# Altium PCB PCB1.PcbDoc
Units mil, origin at the board's own origin, x right, y up, seen from the top; angles counter-clockwise.
Board outline 1615 x 1930 mil, 2 copper layers (Top Layer, Bottom Layer); 24 components, 43 nets, 142 pads, 52 vias.
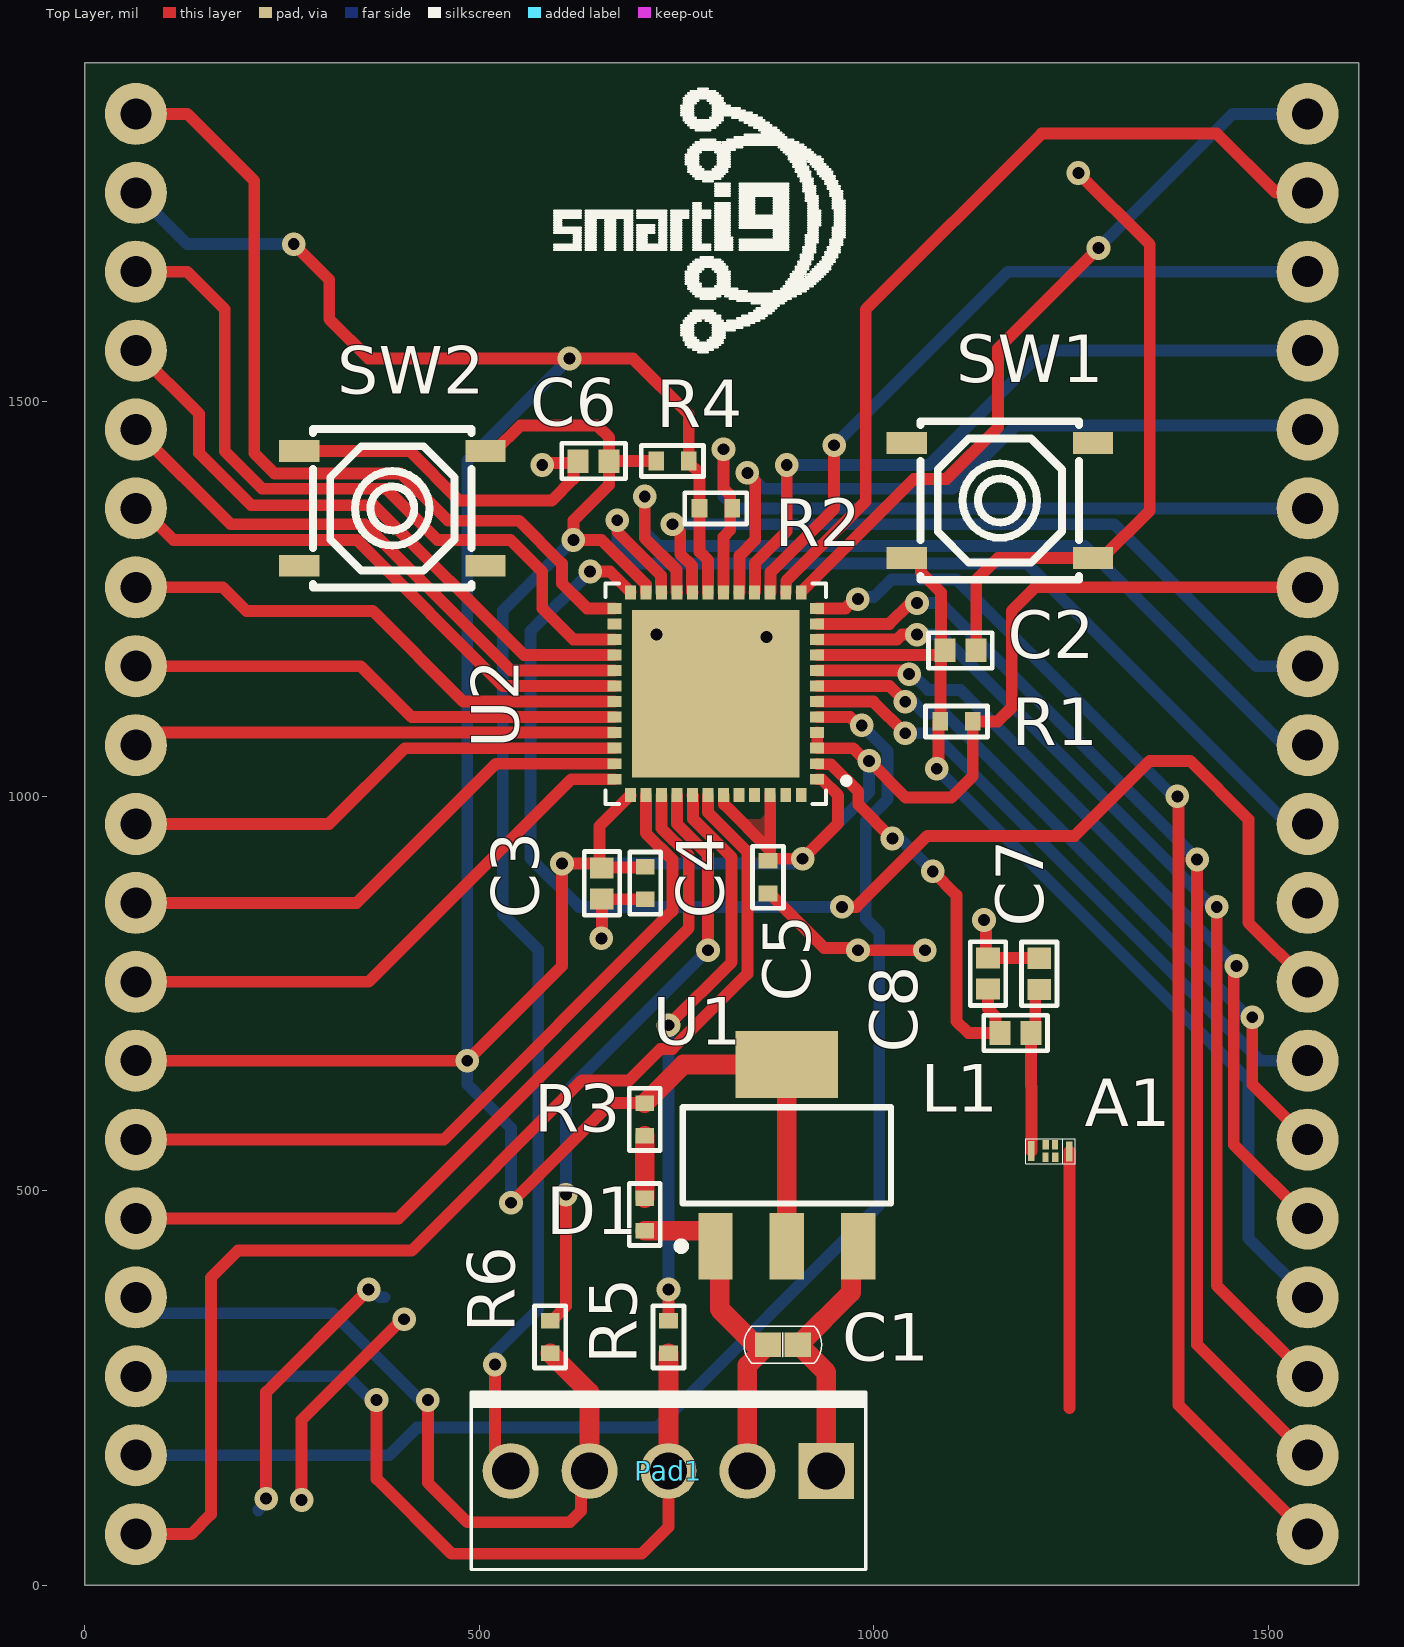
[diagram p0: Top Layer view]
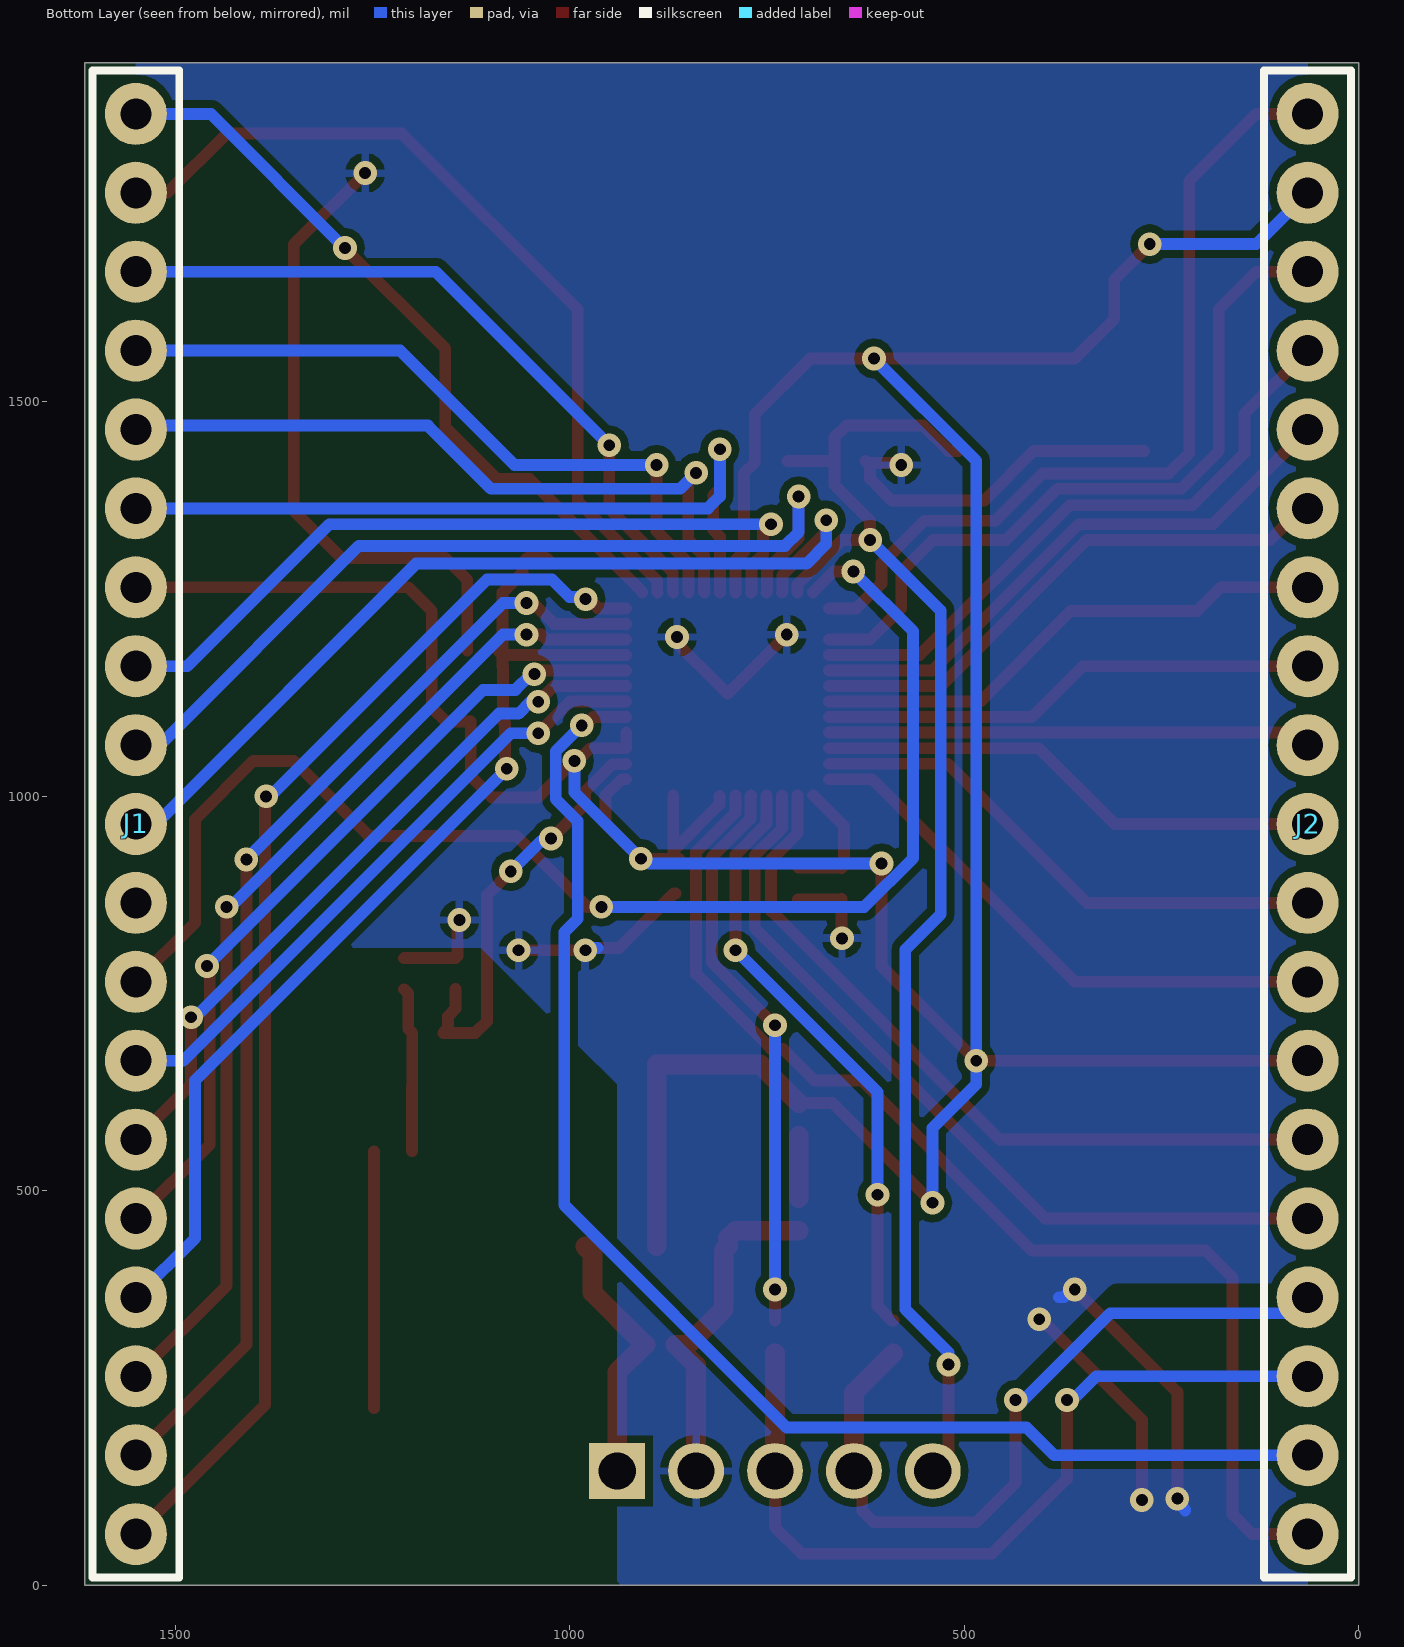
[diagram p1: Bottom Layer view, seen from below]
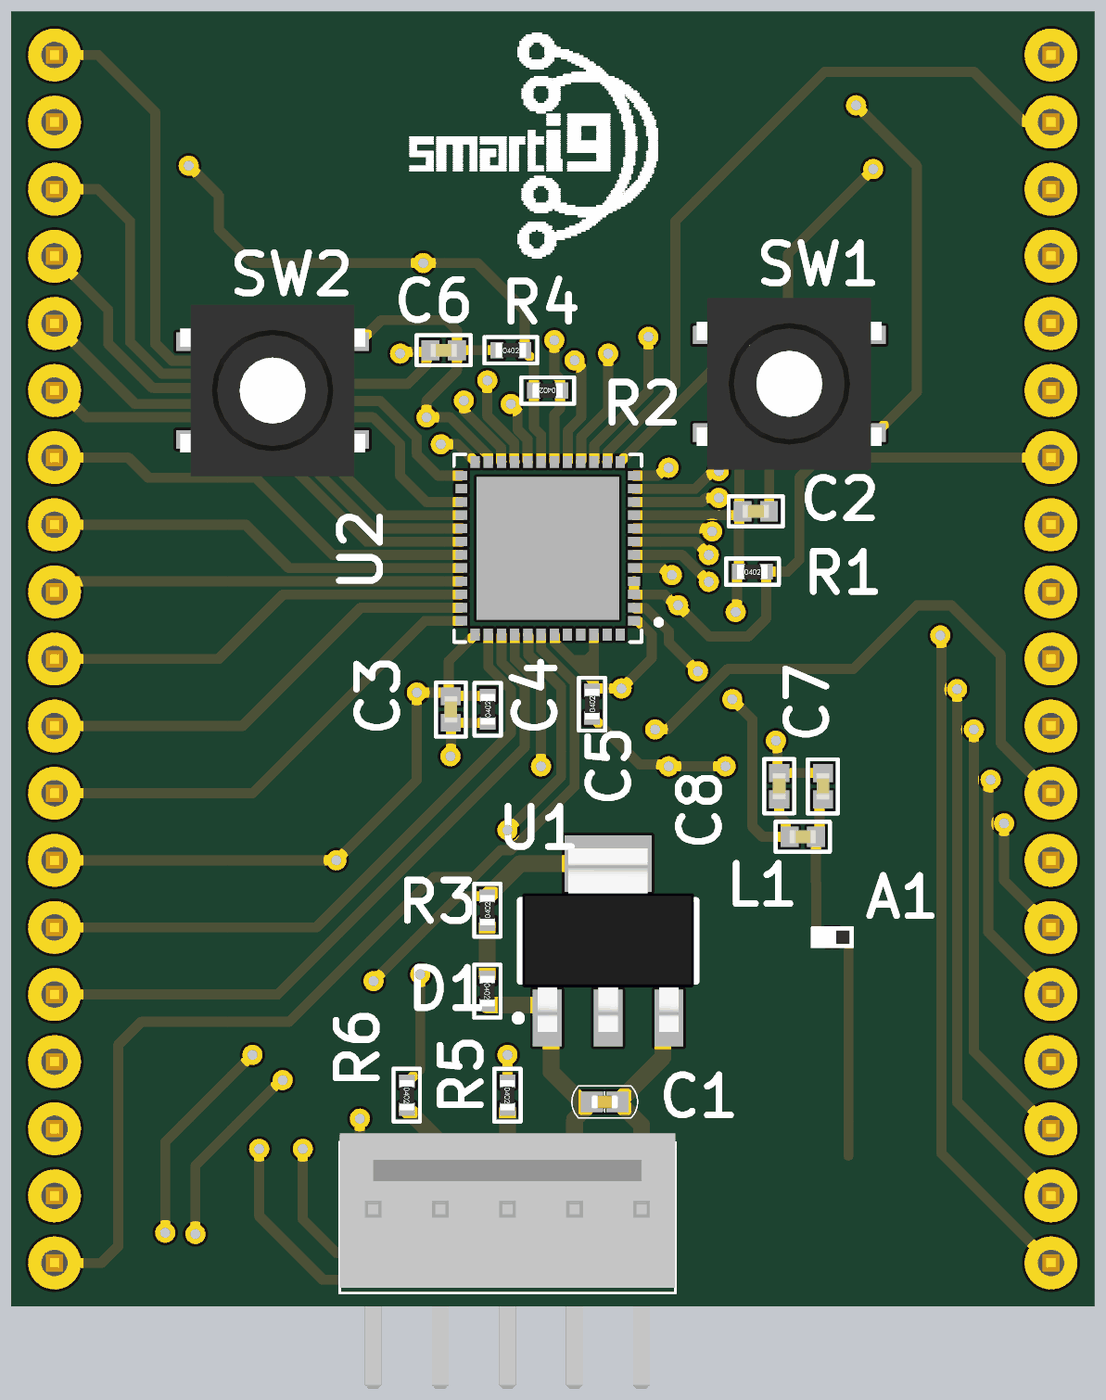
[diagram p2: 3D render of the assembled board from above, using the file's embedded part models]

## Layer stack, top to bottom
Top Solder: solder mask 0.4, Solder Resist, Dk 3.5
Top Layer: signal copper 1.4
Dielectric 1: dielectric 12.6, FR-4, Dk 4.8
Bottom Layer: signal copper 1.4
Bottom Solder: solder mask 0.4, Solder Resist, Dk 3.5

## Board outline
0,0 0,1930 1615,1930 1615,0

## Design rules (kind name [scope] priority, off if disabled: settings)
Clearance [All] p1: gap=1 ignorepadtopadclearanceinfootprint=FALSE except(10: Arc-Fill Arc-Poly Arc-Region Track-Fill Track-Poly Track-Region SMDPad-Fill SMDPad-Poly SMDPad-Region THPad-Fill THPad-Poly THPad-Region Via-Fill Via-Poly Via-Region Fill-Fill Fill-Poly Fill-Region Poly-Poly Poly-Region Region-Region)
PolygonConnect [All] p1: connectstyle=Relief reliefconductorwidth=10 reliefentries=4 polygonreliefangle="90 Angle" airgapwidth=10
RoutingVias [All] p1: holewidth=15 width=30 viastyle="Through Hole" minholewidth=10 minwidth=25 maxholewidth=20 maxwidth=35
SolderMaskExpansion [All] p1: expansion=4
Width [All] p1: maxlimit=50 minlimit=10 preferedwidth=15 minimp=50.000000 maximp=50.000000 favimp=50.000000
30 further rules are at their usual default settings.

## Components (designator, comment, footprint, x,y, rotation, side; value= is the part's Value field where it differs from the comment)
A1 "Antenna 2.4GHz" PCBComponent_1#1 1224.15,550.47 r180 top
C1 "CAP 10uF/50V" "CAP 100nF/50V" 885,305 r0 top
C2 "CAP 100nF/50V" "CAP 10uF/6.3V" 1110,1185 r180 top
C3 "CAP 10uF/50V" "CAP 22uF/6.3V" 655.65,889.68 r90 top
C4 "CAP 10uF/50V" "RES SMD 62k OHM 1% 1/16W 0402" 710.65,890 r90 top
C5 "CAP 100nF/16V" "RES SMD 200k OHM 1% 1/16W 0402" 866.1,897.58 r90 top
C6 "CAP 100nF/50V" "CAP 22uF/6.3V" 645,1425 r0 top
C7 "CAP 100nF/50V" "CAP 10uF/6.3V" 1210,775.16 r270 top
C8 "CAP 100nF/50V" "CAP 10uF/6.3V" 1145,775.47 r270 top
D1 "LED Blue" "RES SMD 0 OHM 1/16W 0402" 710,470 r270 top
J1 "Pin Header" "Pin Header 19 Ways" 1550,1865 r270 bottom
J2 "Pin Header" "Pin Header 19 Ways" 65,65 r90 bottom
L1 "LBEAD" "CAP 10uF/6.3V" 1180,700.16 r180 top
Pad1 "CN_KK_5" CN_KK_5_5045-5 740,145 r180 top value=?
R1 "RES 0603" "RES SMD 0 OHM 1/16W 0402" 1105,1095 r0 top
R2 "RES 0603" "RES SMD 0 OHM 1/16W 0402" 800,1365 r180 top
R3 "RES 0603" "RES SMD 430 OHM 1% 1/16W 0402" 710,590.67 r90 top
R4 "RES 0603" "RES SMD 0 OHM 1/16W 0402" 745,1425 r0 top
R5 "RES 0603" "RES SMD 0 OHM 1/16W 0402" 740,315 r270 top
R6 "RES 0603" "RES SMD 0 OHM 1/16W 0402" 590,315 r270 top
SW1 "Tactile Switch SPST 5.10X0.40 mm" PCBComponent_1#2 1160,1375 r180 top
SW2 "Tactile Switch SPST 5.10X0.40 mm" PCBComponent_1#2 390,1365 r0 top
U1 "LM1117" LM1117 890,545 r90 top
U2 "ESP32-PICO-D4" *PQFN50P700X700X104-49N 800,1130 r180 top

## Footprints (in the part's own frame and the unit in brackets; to place one, negate y for a bottom-side part, rotate by r counter-clockwise, add the part's x,y. Pads: shape width x height; smd on the part's side, far side on the other; paste and mask are expansions set on the pad)
*PQFN50P700X700X104-49N [mm]
  rect 0.45x0.35 smd: 1(-3.265,2.75) 2(-3.265,2.25) 3(-3.265,1.75) 4(-3.265,1.25) 5(-3.265,0.75) 6(-3.265,0.25) 7(-3.265,-0.25) 8(-3.265,-0.75) 9(-3.265,-1.25) 10(-3.265,-1.75) 11(-3.265,-2.25) 12(-3.265,-2.75) 25(3.265,-2.75) 26(3.265,-2.25) 27(3.265,-1.75) 28(3.265,-1.25) 29(3.265,-0.75) 30(3.265,-0.25) 31(3.265,0.25) 32(3.265,0.75) 33(3.265,1.25) 34(3.265,1.75) 35(3.265,2.25) 36(3.265,2.75)
  rect 0.35x0.45 smd: 13(-2.75,-3.265) 14(-2.25,-3.265) 15(-1.75,-3.265) 16(-1.25,-3.265) 17(-0.75,-3.265) 18(-0.25,-3.265) 19(0.25,-3.265) 20(0.75,-3.265) 21(1.25,-3.265) 22(1.75,-3.265) 23(2.25,-3.265) 24(2.75,-3.265) 37(2.75,3.265) 38(2.25,3.265) 39(1.75,3.265) 40(1.25,3.265) 41(0.75,3.265) 42(0.25,3.265) 43(-0.25,3.265) 44(-0.75,3.265) 45(-1.25,3.265) 46(-1.75,3.265) 47(-2.25,3.265) 48(-2.75,3.265)
  rect 5.4x5.4 smd: 49(0,0)
  silkscreen extent -4.3,-3.55 3.55,3.55
"CAP 10uF/6.3V" [mm] "10µF ±20% 6.3V Ceramic Capacitor X5R 0402 (1005 Metric)"
  rect 0.68x0.76 smd: 1(-0.5,0) 2(0.5,0)
  silkscreen extent -1.03,-0.57 1.03,0.57, body extent -0.5,-0.25 0.5,0.25, height 0.51
"CAP 22uF/6.3V" [mm] "22µF ±20% 6.3V Ceramic Capacitor X5R 0402 (1005 Metric)"
  rect 0.68x0.76 smd: 1(-0.5,0) 2(0.5,0)
  silkscreen extent -1.03,-0.57 1.03,0.57, body extent -0.5,-0.25 0.5,0.25, height 0.51
"CAP 100nF/50V" [mm] "0.1µF ±10% 50V Ceramic Capacitor X5R 0402 (1005 Metric)"
  rect 0.84x0.78 smd: 1(-0.48,0) 2(0.48,0)
  silkscreen extent -1.25,-0.6 1.25,0.6, body extent -0.5,-0.25 0.5,0.25, height 0.51
CN_KK_5_5045-5 [mm]
  rect 1.8x1.8 hole 1.2: 1(-5.08,0)
  round 1.8 hole 1.2: 2(-2.54,0) 3(0,0) 4(2.54,0) 5(5.08,0)
  silkscreen extent -6.35,-2.54 6.35,3.18, body extent -6.35,-2.87 6.35,6.77, height 11.11
LM1117 [mm] "SOT223, 4-Leads, Body 6,50x7,00mm (avg), Pitch 2,30mm, IPC Medium Density"
  rect 2.15x1.1 smd: 1(-2.925,2.3) 2(-2.925,0) 3(-2.925,-2.3)
  rect 2.15x3.3 smd: 4(2.925,0)
  silkscreen extent -3.05,-3.35 1.55,3.52, body extent -3.45,-3.25 3.51,3.25, height 1.66
PCBComponent_1#1 [mil]
  rect 8.26x25.2 smd: 1(-24.07,0.42) 4(24.07,0.03)
  rect 7.88x11.81 smd: 2(-5.94,8) 3(6.2,8.03) 5(6.06,-8.03)
  rect 7.87x11.81 smd: 6(-5.85,-8.03)
  silkscreen extent -31,-16 32,16, body extent -31,-16 31,16, height 16
PCBComponent_1#2 [mil]
  rect 51.18x27.56 smd: 1(-118.11,72.83) 2(118.11,72.83) 3(-118.11,-72.84) 4(118.11,-72.84)
  silkscreen extent -100,-100 100,100, body extent -138,-128 138,128, height 122
"Pin Header 19 Ways" [mm] "Connector Header 19 ways PTH 0.100\" (2.54mm)"
  round 2 hole 1: 1(0,0) 2(2.54,0) 3(5.08,0) 4(7.62,0) 5(10.16,0) 6(12.7,0) 7(15.24,0) 8(17.78,0) 9(20.32,0) 10(22.86,0) 11(25.4,0) 12(27.94,0) 13(30.48,0) 14(33.02,0) 15(35.56,0) 16(38.1,0) 17(40.64,0) 18(43.18,0) 19(45.72,0)
  silkscreen extent -1.4,-1.4 47.12,1.4, body extent -1.27,-1.27 46.99,1.27, height 10.11
"RES SMD 0 OHM 1/16W 0402" [mm] "0 Ohms Jumper 0.063W, 1/16W Chip Resistor 0402 (1005 Metric) Moisture Resistant Thick Film"
  rect 0.5x0.6 smd: 1(-0.525,0) 2(0.525,0)
  silkscreen extent -1,-0.5 1,0.5, body extent -0.57,-0.27 0.58,0.28, height 0.41
"RES SMD 62k OHM 1% 1/16W 0402" [mm] "62 kOhms ±1% 0.063W, 1/16W Chip Resistor 0402 (1005 Metric) Moisture Resistant Thick Film"
  rect 0.5x0.6 smd: 1(-0.525,0) 2(0.525,0)
  silkscreen extent -1,-0.5 1,0.5, body extent -0.57,-0.27 0.58,0.28, height 0.41
"RES SMD 200k OHM 1% 1/16W 0402" [mm] "200 kOhms ±1% 0.063W, 1/16W Chip Resistor 0402 (1005 Metric) Moisture Resistant Thick Film"
  rect 0.5x0.6 smd: 1(-0.525,0) 2(0.525,0)
  silkscreen extent -1,-0.5 1,0.5, body extent -0.57,-0.27 0.58,0.28, height 0.41
"RES SMD 430 OHM 1% 1/16W 0402" [mm] "430 Ohms ±1% 0.063W, 1/16W Chip Resistor 0402 (1005 Metric) Moisture Resistant Thick Film"
  rect 0.5x0.6 smd: 1(-0.525,0) 2(0.525,0)
  silkscreen extent -1,-0.5 1,0.5, body extent -0.57,-0.27 0.58,0.28, height 0.41

## Part data
A1: "SMD Antennas RoHS", Frequency Range="2.4 GHz", LCSC Part #=C209892, Manufacturer=TDK, MFR.Part #=ANT016008LCS2442MA2, ComponentLink1Description=Datasheet, ComponentLink1URL=https://datasheet.lcsc.com/szlcsc/1809131538_TDK-ANT016008LCS2442MA2_C209892.pdf
C1 C3 C4: library part "CAP  10uF/50V", "10uF ±1% 50V Ceramic Capacitor C0G, NP0 0805 (2012 Metric)", Capacitance=10uF, Manufacturer 1="Murata Electronics North America", Manufacturer 1 PN=GRM2165C1H102FA01D, Voltage=50V, ComponentLink1Description=Datasheet, ComponentLink1URL=https://www.murata.com/~/media/webrenewal/support/library/catalog/products/capacitor/mlcc/c02e.ashx?la=en-us, Digikey PN=490-6441-1-ND, Mouser PN=81-GRM2165C1H102FA01
C2 C6 C7 C8: "0.1µF ±10% 50V Ceramic Capacitor X5R 0402 (1005 Metric)", Capacitance=100nF, Manufacturer 1=Yageo, Manufacturer 1 PN=CC0402KRX5R9BB104, Voltage=50V, ComponentLink1Description=Datasheet, ComponentLink1URL=https://search.murata.co.jp/Ceramy/image/img/A01X/G101/ENG/GRM022R60J103KE19-01.pdf, Digikey PN=311-3342-1-ND
C5: "0.1µF ±20% 16V Ceramic Capacitor Y5V (F) 0805 (2012 Metric)", Capacitance=100nF, Manufacturer 1="Samsung Electro-Mechanics", Manufacturer 1 PN=CL21A106KOQNNWE, Voltage=16V, ComponentLink1Description=Specifications, ComponentLink1URL=http://www.samsungsem.com/kr/support/product-search/mlcc/__icsFiles/afieldfile/2018/07/27/CL21A106KOQNNWE.pdf, Digikey PN=1276-2894-1-ND, Mouser PN=581-08055C104K4Z4A
D1: "Blue 470nm LED Indication - Discrete 3.3V 0805 (2012 Metric)", Manufacturer 1="Lite-On Inc.", Manufacturer 1 PN=LTST-C171TBKT
J1 J2: library part "Pin Header 19 ways", "Connector Header PTH 0.100\" (2.54mm)", Manufacturer 1="Irwin Inc.", Manufacturer 1 PN=M20-9992046
L1: library part IND_LBEAD_SMD_1806, "Inductor LBEAD"
Pad1: "KK_5"
R1 R2 R4: library part "RES 10k 1% 1/8W", "10 kOhms ±1% 0.125W, 1/8W Chip Resistor 0603 (1608 Metric) Anti-Sulfur, Moisture Resistant Thin Film", Manufacturer 1="Stackpole Electronics Inc.", Manufacturer 1 PN=RNCP0603FTD10K0, Power=1/8W, Resistence=10k, ComponentLink1Description=Datasheet, ComponentLink1URL=http://www.yageo.com/documents/recent/PYu-RC_Group_51_RoHS_L_9.pdf, Digikey PN=RNCP0603FTD10K0CT-ND, Mouser PN=755-ESR03EZPF1002
R3 R5 R6: library part "RES 10k 1% 1/8W", "10 kOhms ±1% 0.125W, 1/8W Chip Resistor 0603 (1608 Metric) Anti-Sulfur, Moisture Resistant Thin Film", Manufacturer 1="Stackpole Electronics Inc.", Manufacturer 1 PN=RNCP0603FTD10K0, Power=1/8W, Resistence=1k, ComponentLink1Description=Datasheet, ComponentLink1URL=http://www.yageo.com/documents/recent/PYu-RC_Group_51_RoHS_L_9.pdf, Digikey PN=RNCP0603FTD10K0CT-ND, Mouser PN=755-ESR03EZPF1002
SW1 SW2: "TACTILE SWITCHES SPST 5.10MM X 5.10MM 0.40MM 50MA @ 12VDC SMD ROHS", Current="50 mA", LCSC Part #=C318884, Manufacturer="XKB Enterprise", MFR.Part #=TS-1187A-B-A-B, Package=SMD-SW-4_5.1x5.1x1.5, Voltage="12 VDC"
U1: "Linear Voltage Regulator IC Positive Fixed 1 Output 3.3V 1A SOT-223", Manufacturer 1="Diodes Incorporated", Manufacturer 1 PN=AZ1117EH-3.3TRG1, Manufacturer 2=STMicroelectronics, Manufacturer 2 PN=LD1117S33TR, ComponentLink1Description=Datasheet, ComponentLink1URL=https://www.diodes.com/assets/Datasheets/AZ1117E.pdf, Digikey PN=AZ1117EH-3.3TRG1DICT-ND, Mouser PN=621-AZ1117EH-3.3TRG1, Notes="Every PMIC named 1117 is the same"
U2: "RF TRANSCEIVER ICS QFN-48_7X7X05P ROHS", LCSC Part #=C193707, Manufacturer="Espressif Systems", Package=QFN-48_EP_7.0x7.0x0.5P, ComponentLink1Description=Datasheet, ComponentLink1URL=https://datasheet.lcsc.com/szlcsc/Espressif-Systems-ESP32-PICO-D4_C193707.pdf, ComponentLink2Description=Datasheet_EN, ComponentLink2URL=https://www.espressif.com/sites/default/files/documentation/esp32-pico-d4_datasheet_en.pdf, MFR.Part #=ESP32-PICO-D4

## Via types
v1: diameter 30, hole 15, Top Layer to Bottom Layer, 52 vias

## Nets (pads, with @x,y where several pads share a name; then routed paths per layer and width w, separated by ;. In a path a pad name is that pad's centre, name@x,y a point inside that pad or via, vN(x,y) a via of type N, cw(c..) or ccw(c..) an arc to the next point about the centre after c; other vN are vias at no path point)
EN: C2.2 J1.16 R1.1 SW1.2 U2.9 | length 1338.7
  Top Layer w15: U2.9 C2.2@1085.32,1179.21 ; SW1.2@1023.8,1295.89 1030.08,1302.17 SW1.2 1053.7,1302.17 1059.98,1295.89 1059.98,1284.08 1085.32,1258.74 C2.2@1085.32,1184.59 ; v1(1080,1035) 1082.16,1037.16 1082.16,1092.84 1084.82,1095.49 1084.82,1164.51 1085.32,1165 C2.2@1085.32,1179.21 ; C2.2@1090.72,1184.59 C2.2@1085.32,1179.21
  Bottom Layer w15: v1(1080,1035) 1475,640 1475,440 J1.16
EXT_5V: C1.2 Pad1.1 U1.3 | length 331.7
  Top Layer w25: C1.2 C1.2@905.08,305 ; Pad1.1 940,270.08 C1.2@905.08,305 ; U1.3 971.4,420.69 971.4,371.32 C1.2@905.08,305
FLASH_CLK: J2.13 U2.31 | length 666.5
  Top Layer w15: J2.13 175,1265 205,1235 365,1235 479.84,1120.16 U2.31
FLASH_CS: J2.19 U2.25 | length 1082.8
  Top Layer w15: J2.19 130,1865 215,1780 215,1435 240.63,1409.37 400.63,1409.37 460.67,1349.33 550.67,1349.33 605,1295 605,1270 636.73,1238.27 U2.25
FLASH_SD0: J2.17 U2.27 | length 932.1
  Top Layer w15: J2.17 130,1665 177.5,1617.5 177.5,1437.5 225,1390 382.16,1390 447.16,1325 539.63,1325 580,1284.63 580,1238.27 619.37,1198.9 U2.27
FLASH_SD1: J2.11 U2.33 | length 613
  Top Layer w15: J2.11 82.25,1065 98.04,1080.79 U2.33
FLASH_SD2: J2.14 U2.30 | length 699.7
  Top Layer w15: J2.14 72.5,1365 112.5,1325 345,1325 530.16,1139.84 U2.30
FLASH_SD3: J2.12 U2.32 | length 633.2
  Top Layer w15: J2.12 350,1165 414.53,1100.47 U2.32
GND: C1.1 C2.1 C3.1 C4.1 C5.1 C6.1 C7.1 C8.1 D1.2 Pad1.2 SW1.1 SW2.1 U1.1 U2.49 | length 3034.1
  Top Layer w15: v1(230,110) 230,245 v1(360,375) ; SW2.1 412.16,1437.84 475,1375 592.06,1375 619.43,1402.37 619.43,1419.11 C6.1@622.82,1422.5 ; v1(275,108.12) 275,210 402.38,337.38 v1(405,337.38) ; v1(580,1420) 582.5,1422.5 C6.1@622.82,1422.5 ; C6.1 C6.1@622.82,1422.5 ; v1(655,820) 655.65,820.65 C3.1 655.99,869.67 710.32,869.67 C4.1 ; v1(725,1205) U2.49 871.98,1201.98 v1(864.13,1201.98) ; C5.1 868.07,876.91 937.11,807.87 980.29,807.87 983.16,805 v1(1065,805) ; C2.1@1130,1185 1130,1274.33 1157.84,1302.17 SW1.1 1289.92,1302.17 1350,1362.24 1350,1699.51 v1(1259.51,1790) ; v1(1140,843.27) 1142.5,840.77 1142.5,797.66 C8.1 1145.16,795 1209.84,795 C7.1
  Top Layer w25: D1.2 790.29,449.33 799.45,440.18 U1.1 804.98,424.31 804.98,350.02 850,305 C1.1@864.92,305 ; Pad1.2 840,278.9 862.07,300.96 862.07,302.15 C1.1@864.92,305 ; C1.1 C1.1@864.92,305
  Bottom Layer w15: 220,95 220,95.94 230,105.94 v1(230,110) ; v1@270,108.12 v1(275,108.12) ; v1(360,375) 364.06,375 373.81,365.25 380,365.25 ; 965,808.12 965.25,807.87 977.42,807.87 v1(980.29,805)
IO0: C6.2 Pad1.5 R4.1 SW2.2 U2.23 | length 1775.6
  Top Layer w15: SW2.2 519.92,1437.84 552.09,1470 649.69,1470 664.69,1455 C6.2 ; v1(520,280) 520,165 Pad1.5 ; v1(619.43,1325) 619.43,1349.59 664.69,1394.84 C6.2 ; v1@624.33,1325 655,1325 711.42,1268.58 U2.23 ; R4.1 C6.2
  Bottom Layer w15: v1(520,280) 520,295 575,350 575,805.79 530,850.79 530,1235.57 614.53,1320.1 618.76,1320.1 619.43,1319.43 v1(619.43,1325)
IO2: J1.10 U2.22 | length 1166.7
  Top Layer w15: v1(675,1350) 675,1335.53 730.49,1280.04 730.49,1259.15 U2.22
  Bottom Layer w15: v1(675,1350) 675,1320 700,1295 1195,1295 1521.21,968.79 1546.21,968.79 J1.10
IO4: J1.12 U2.24 | length 1752
  Top Layer w15: v1(640.67,1285) 666.02,1285 691.73,1259.29 U2.24 ; v1(960,860) 978.14,860 1068.14,950 1255,950 1350,1045 1401.05,1045 1475,971.05 1475,840 J1.12 J1.12@1535,765
  Bottom Layer w15: v1(640.67,1285) 565,1209.33 565,921.77 626.77,860 v1(960,860)
IO5: J2.10 U2.34 | length 646.3
  Top Layer w15: J2.10 309.58,965 405.68,1061.1 U2.34
IO9: J2.16 U2.28 | length 795.5
  Top Layer w15: J2.16 145,1485 145,1435 211,1369 366.68,1369 556.47,1179.21 U2.28
IO10: J2.15 U2.29 | length 733
  Top Layer w15: J2.15 185,1345 355,1345 540.47,1159.53 U2.29
IO12: J1.6 R2.1 U2.18 | length 996.7
  Top Layer w15: U2.18 809.84,1329.17 818.33,1337.66 818.33,1362.66 R2.1 818.33,1367.34 818.33,1381.67 809.84,1390.16 v1(809.84,1440)
  Bottom Layer w15: v1(809.84,1440) 809.84,1380.16 825,1365 J1.6
IO13: J1.8 U2.20 | length 976.6
  Top Layer w15: v1(745,1345) 755,1335 755,1307.17 769.86,1292.3 769.86,1259.15 U2.20
  Bottom Layer w15: v1(745,1345) 1305,1345 1485,1165 J1.8
IO14: J1.5 U2.17 | length 917.6
  Top Layer w15: U2.17 830.14,1259.15 830.14,1305.14 850,1325 850,1400 v1(840,1410)
  Bottom Layer w15: v1(840,1410) 860,1390 1100,1390 1180,1470 1545,1470 J1.5
IO15: J1.9 U2.21 | length 1139.3
  Top Layer w15: v1(710,1380) 710,1327.17 750.18,1286.99 750.18,1259.15 U2.21
  Bottom Layer w15: v1(710,1380) 710,1335 727.5,1317.5 1267.5,1317.5 1525,1060 1545,1060 J1.9
IO18: J2.9 U2.35 | length 679.5
  Top Layer w15: J2.9 344.92,865 521.34,1041.42 U2.35
IO19: J2.6 U2.38 | length 960.5
  Top Layer w15: J2.6 455.07,565 745,854.93 745,920 711.42,953.58 U2.38
IO21: J2.1 U2.42 | length 1476.9
  Top Layer w15: J2.1@80,65 135,65 160,90 160,390 194.31,424.31 414.31,424.31 630,640 690,640 730,680 744.99,680 840,775.01 840,929.69 790.16,979.53 U2.42
IO22: J2.5 U2.39 | length 1035.9
  Top Layer w15: J2.5 397.63,465 765.67,833.04 765.67,925.12 731.1,959.69 U2.39
IO23: J2.8 U2.36 | length 712.8
  Top Layer w15: J2.8 360,765 616.73,1021.73 U2.36
IO25: J1.2 U2.14 | length 1084
  Top Layer w15: U2.14 889.19,1259.15 889.19,1273.19 990,1374 990,1617.16 1212.84,1840 1435,1840 1510,1765 J1.2
IO26: J1.3 U2.15 | length 911.2
  Top Layer w15: U2.15 869.51,1259.15 869.51,1284.25 950,1364.75 v1(950,1445)
  Bottom Layer w15: v1(950,1445) 1170,1665 J1.3
IO27: J1.4 U2.16 | length 898.4
  Top Layer w15: U2.16 849.82,1259.15 849.82,1295.92 890,1336.1 v1(890,1420)
  Bottom Layer w15: v1(890,1420) 1070,1420 1215,1565 J1.4
IO32: J1.19 U2.12 | length 1588.9
  Top Layer w15: U2.12 964.21,1238.27 975.94,1250 v1(980,1250) ; v1(1385,1000) 1386.5,998.5 1386.5,228.5 J1.19
  Bottom Layer w15: v1(980,1250) 982.5,1252.5 1000.27,1252.5 1022.77,1275 1105,1275 1380,1000 v1(1385,1000)
IO33: J1.1 U2.13 | length 952
  Top Layer w15: U2.13 908.27,1259.29 1051.35,1402.37 1092.37,1402.37 1157.84,1467.84 1157.84,1567.84 v1(1285,1695)
  Bottom Layer w15: v1(1285,1695) 1455,1865 J1.1
IO34: J1.17 U2.10 | length 1294.5
  Top Layer w15: U2.10 1029.84,1198.9 1035.94,1205 v1(1055,1205) ; v1(1435,860) 1435,380 J1.17
  Bottom Layer w15: v1(1055,1205) 1085,1205 1430,860 v1(1435,860)
IO35: J1.18 U2.11 | length 1440
  Top Layer w15: U2.11 1019.99,1218.58 1046.41,1245 v1(1055,1245) ; v1(1410,920) 1410,305 J1.18
  Bottom Layer w15: v1(1055,1245) 1085,1245 v1(1410,920)
IO37: J1.13 U2.6 | length 810
  Top Layer w15: U2.6 999.84,1120.16 v1(1040,1080)
  Bottom Layer w15: v1(1040,1080) 1075,1080 1490,665 J1.13
IO38: J1.14 U2.7 | length 909.4
  Top Layer w15: U2.7 1020.16,1139.84 v1(1040,1120) ; v1(1480,720) 1480,635 J1.14
  Bottom Layer w15: v1(1040,1120) 1050,1120 1065,1105 1090,1105 1475,720 v1(1480,720)
LNA_IN: C8.2 L1.2 U2.2 | length 538.4
  Top Layer w15: U2.2 929.15,1040.81 945.96,1040.81 980.55,1006.21 980.55,989.8 v1(1023.8,946.56) ; v1(1075,905) 1105,875 1105,715 1119.84,700.16 L1.2 1154.43,706.04 1154.43,721.36 1145,730.79 C8.2
  Bottom Layer w15: v1(1023.8,946.56) 1026.67,943.68 1036.31,943.68 v1(1075,905)
NetA1_4: A1.4 C7.2 L1.1 | length 209.5
  Top Layer w15: A1.4 1200.08,632.33 1199.69,632.73 L1.1 1204.84,705.31 1204.84,750.31 C7.2
NetD1_A: D1.1 R3.1 | length 79.3
  Top Layer w25: D1.1 R3.1
NetR5_1: R5.1 U2.41 | length 719.4
  Top Layer w15: R5.1 v1(740,375) ; v1(740,710) 820,790 820,922.63 771.08,971.55 771.08,1000.85 U2.41
  Bottom Layer w15: v1(740,375) v1(740,710)
NetR6_1: R6.1 U2.40 | length 766
  Top Layer w15: R6.1 591.97,335.67 610,353.7 v1(610,495) ; U2.40 750.79,965.29 790,926.08 v1(790,805)
  Bottom Layer w15: v1(610,495) 610,625 v1(790,805)
RXD0: J2.4 Pad1.4 R6.2 | length 975
  Top Layer w15: v1(435,235) 435,130 485,80 615,80 629.31,94.31 629.31,134.31 Pad1.4
  Top Layer w25: R6.2 640,244.33 Pad1.4
  Bottom Layer w15: J2.4 85,345 315,345 425,235 v1(435,235)
SENSOR_VN: J1.15 U2.8 | length 1046.8
  Top Layer w15: U2.8 1036.41,1159.53 1040.94,1155 v1(1045,1155) ; v1(1460,785) 1460,780.94 1456.5,777.44 1456.5,558.5 J1.15
  Bottom Layer w15: v1(1045,1155) 1049.06,1155 1069.06,1135 1110,1135 v1(1460,785)
SENSOR_VP: J2.2 U2.5 | length 1774.3
  Top Layer w15: U2.5 970.47,1100.47 980.94,1090 v1(985,1090)
  Bottom Layer w15: J2.2 386.12,165 421.12,200 725,200 1007.1,482.1 1007.1,827.71 990,844.82 990,968.74 1017.77,996.52 1017.77,1057.23 v1(985,1090)
TXD0: J2.3 Pad1.3 R5.2 | length 1061.3
  Top Layer w15: v1(370,235) 370,135 465,40 706.21,40 740,73.79 Pad1.3
  Top Layer w25: Pad1.3 R5.2
  Bottom Layer w15: J2.3 332.82,265 362.82,235 v1(370,235)
VDD33: C3.2 C4.2 C5.2 J1.7 J2.7 J2.18 R1.2 R2.2 R3.2 R4.2 U1.2 U1.4 U2.1 U2.3 U2.4 U2.19 U2.37 U2.43 U2.46 | length 5537.8
  Top Layer w15: J2.7 v1(485,665) 605,785 v1(605,915) 650.02,915 C3.2@652.38,912.64 ; J2.18 J2.18@66.87,1763.13 ; v1(265,1700) 310,1655 310,1605 360,1555 v1(614.53,1555) 695,1555 765.67,1484.33 R4.2 765.67,1423.03 779.33,1409.37 R2.2 779.33,1309.84 790.16,1299.01 U2.19 ; v1(540.47,485) 666.81,611.34 R3.2 ; U2.37 652.38,962.11 C3.2@652.38,912.64 ; C4.2 710,910.02 656.3,910.02 C3.2 C3.2@652.38,912.64 ; U2.43@810.45,1000.85 810.45,989.75 868.9,931.3 C5.2@868.9,921.05 ; 868.9,933.21 U2.46 ; U2.1 934.48,1021.73 955,1001.21 955,966.05 v1(910,921.05) C5.2@868.9,921.05 ; U2.4 U2.3 974.11,1061.1 990.22,1045 v1(994.27,1045) 1040.77,998.5 1098.5,998.5 1125.67,1025.67 R1.2 1157.34,1095 1175,1112.66 1175,1235 1205,1265 J1.7 ; C5.2@868.9,921.05 861.34,921.05 864.13,918.25 C5.2 C5.2@868.9,921.05
  Top Layer w25: R3.2 758.82,660.16 U1.4 U1.2
  Bottom Layer w15: J2.18 130,1700 v1(265,1700) ; v1(540.47,485) 540.47,579.53 485,635 v1(485,665) 485,1425.47 v1(614.53,1555) ; v1(605,915) 899.89,915 905.94,921.05 v1(910,921.05) 994.27,1005.32 v1(994.27,1045)
pads on no net: A1.1 A1.2 A1.3 A1.5 A1.6 J1.11 SW1.3 SW1.4 SW2.3 SW2.4 U2.26 U2.44 U2.45 U2.47 U2.48
copper on no net: | length 325.1
  Top Layer w15: 1248.23,225 1248.23,296.77 1248.23,514.95 1248.23,550.05

## Polygon pours and split planes (outlines as drawn)
VDD33 on Top Layer "VDD33_L01_P008" (solid, remove dead copper, pour order 8): 830.14,975 834.09,971.05 856.05,971.05 865,980 868.9,980 868.9,951 860,942.11
no net on Top Layer (solid, pour order 4): 862.07,953.58
no net on Top Layer (solid, pour order 0): 835,967.11
GND on Bottom Layer "GND_L02_P012" (solid, remove dead copper, pour order 12): 935,0 940,5 940,635 1113.12,808.12 1495,808.12 1495,810 1550,865 1550,1930 65,1930 65,0

## Silkscreen, mask and mechanical layers (free items; w line width, h text height)
Top Overlay:
  drawing of 418 lines, arcs and shapes, not listed
Mechanical 1:
  the board outline again, w10